# Altium PCB 2016.PcbDoc (part 3 of 6)
Units mm, origin at the board's own origin, x right, y up, seen from the top; angles counter-clockwise.
Board outline 169.8 x 134.24 mm, 2 copper layers (Top Layer, Bottom Layer); 131 components, 191 nets, 797 pads, 168 vias.
Unrouted connection lines stored in the file: 2.
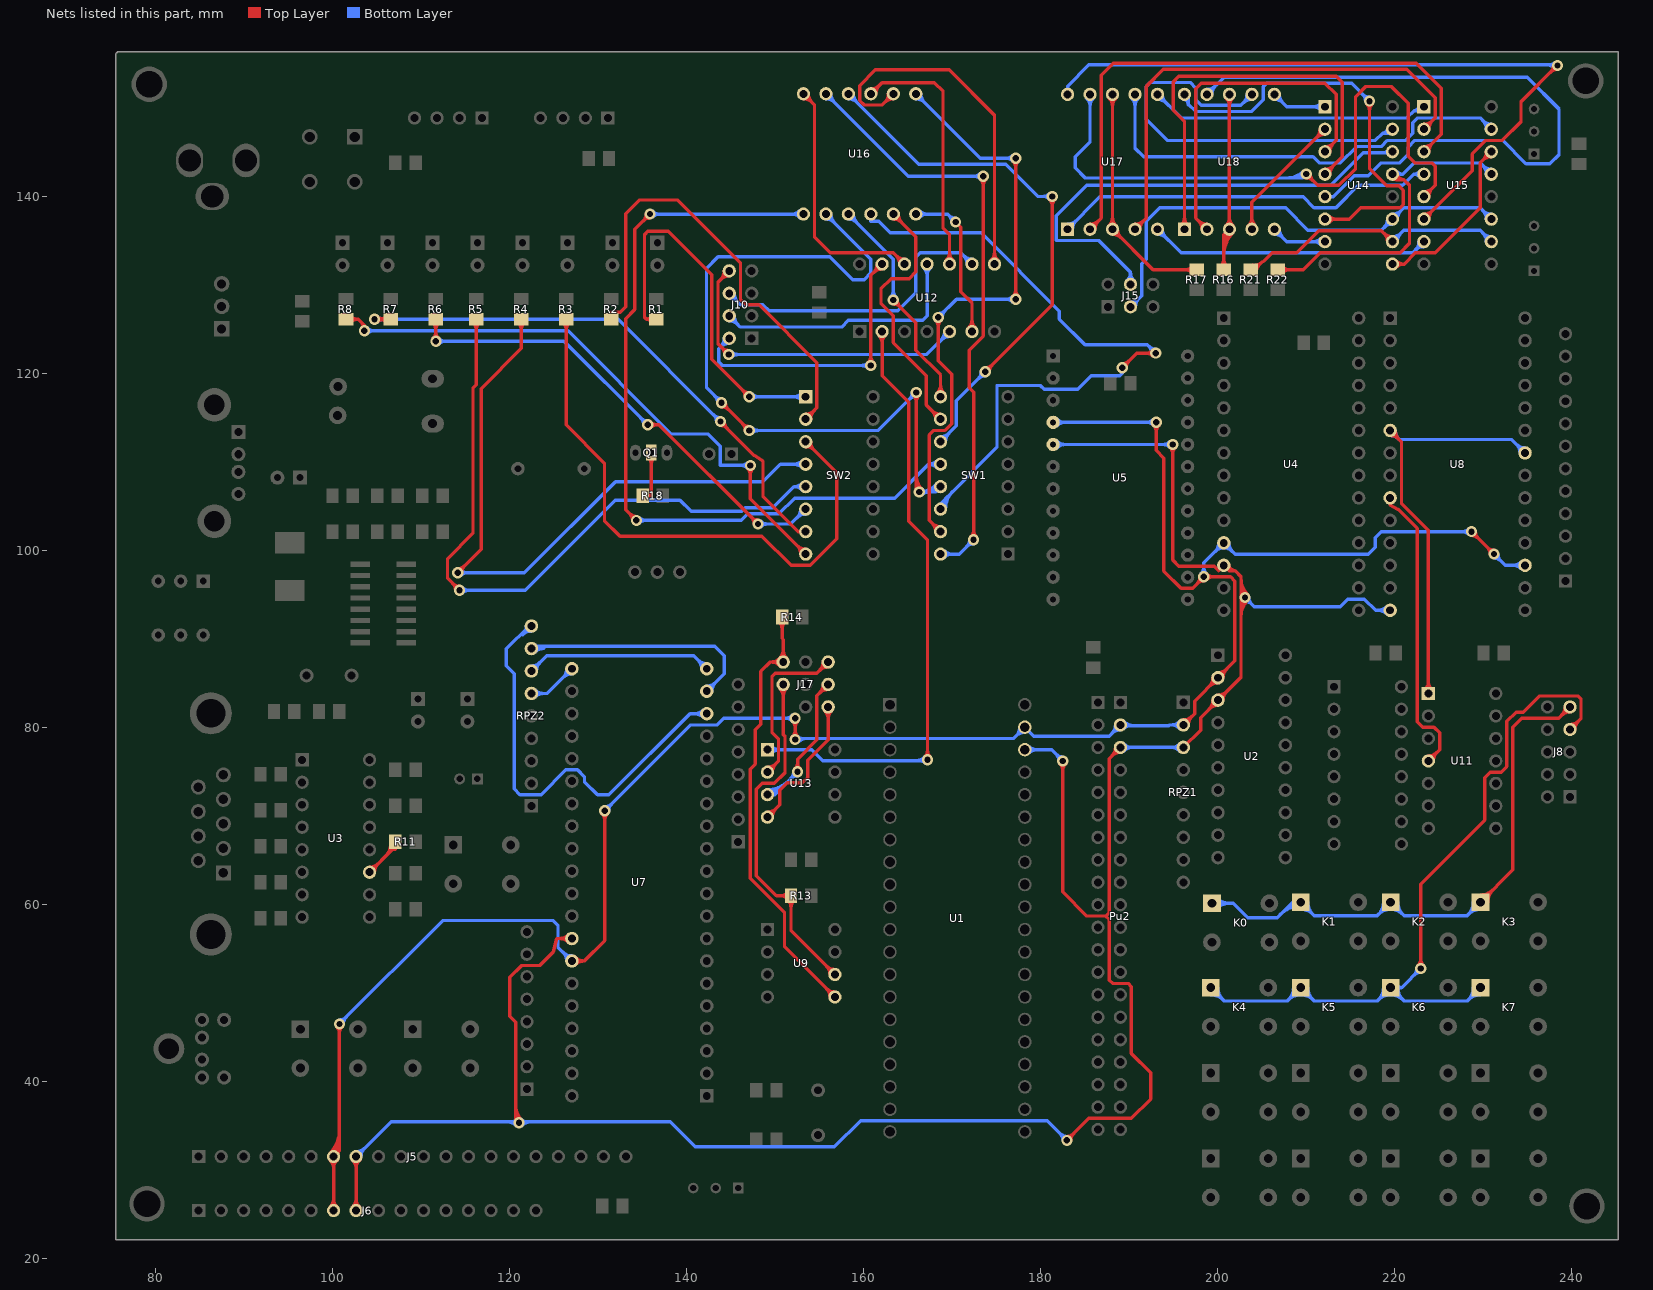
[diagram p3: the nets of this part, all layers, seen from the top]

## Via types
v1: diameter 1.27, hole 0.711, Top Layer to Bottom Layer, 165 vias
v2: diameter 1, hole 0.5, Top Layer to Bottom Layer, 3 vias

## Nets (pads, with @x,y where several pads share a name; then routed paths per layer and width w, separated by ;. In a path a pad name is that pad's centre, name@x,y a point inside that pad or via, vN(x,y) a via of type N, cw(c..) or ccw(c..) an arc to the next point about the centre after c; other vN are vias at no path point) (continued)
NetJ8_7: J8.7 K4.1 K5.1 K6.1 K7.1 | length 119.8
  Top Layer w0.381: v1@222.596,53.07 ccw(c221.837,53.829) 222.91,53.829 ccw(c223.984,53.829) v1@223.225,53.07 ; v1(222.91,52.756) 222.91,62.282 230.149,69.52 230.149,74.295 230.784,74.93 232.004,74.93 232.639,75.565 232.639,80.671 233.68,81.712 234.518,81.712 236.348,83.541 240.665,83.541 241.021,83.185 241.021,81.001 J8.7@239.776,79.756 ; J8.7@239.776,80.315 ccw(c239.776,81.666) 240.731,80.711 ccw(c241.686,79.756) J8.7@240.335,79.756
  Bottom Layer w0.381: K4.1@199.188,49.777 cw(c199.188,47.823) 200.57,49.205 cw(c201.952,50.587) K4.1@199.998,50.587 ; K4.1@199.188,50.158 cw(c199.188,49.124) 199.92,49.856 cw(c200.651,50.587) K4.1@199.617,50.587 ; K4.1@199.188,50.587 200.702,49.073 207.834,49.073 K5.1@209.348,50.587 210.862,49.073 217.994,49.073 K6.1@219.508,50.587 ; K5.1@208.539,50.587 cw(c206.584,50.587) 207.966,49.205 cw(c209.348,47.823) 209.348,49.777 cw(c209.348,47.823) 210.73,49.205 cw(c212.112,50.587) K5.1@210.158,50.587 ; K5.1@208.92,50.587 cw(c207.885,50.587) 208.617,49.856 cw(c209.348,49.124) 209.348,50.158 cw(c209.348,49.124) 210.08,49.856 cw(c210.811,50.587) K5.1@209.777,50.587 ; K6.1@218.699,50.587 cw(c216.744,50.587) 218.126,49.205 cw(c219.508,47.823) 219.508,49.777 cw(c219.508,47.823) 220.89,49.205 cw(c222.272,50.587) K6.1@220.318,50.587 ; K6.1@219.08,50.587 cw(c218.045,50.587) 218.777,49.856 cw(c219.508,49.124) 219.508,50.158 cw(c219.508,49.124) 220.24,49.856 cw(c220.971,50.587) K6.1@219.937,50.587 ; K6.1@220.251,50.265 cw(c220.742,50.052) 220.742,50.587 ; K6.1@220.251,50.909 ccw(c220.742,51.122) 220.742,50.587 ; v1@222.466,52.756 cw(c221.393,52.756) 222.152,51.997 cw(c222.91,51.238) v1@222.91,52.311 ; v1(222.91,52.756) 220.742,50.587 ; K7.1@228.859,50.587 cw(c226.904,50.587) 228.286,49.205 cw(c229.668,47.823) K7.1@229.668,49.777 ; K7.1@229.24,50.587 cw(c228.205,50.587) 228.937,49.856 cw(c229.668,49.124) K7.1@229.668,50.158 ; K7.1@229.668,50.587 228.154,49.073 221.022,49.073 K6.1@219.508,50.587 ; K6.1@219.508,50.587 220.742,50.587
NetJ8_9: J8.9 K0.1 K1.1 K2.1 K3.1 | length 97.6
  Top Layer w0.381: K3.1@229.668,60.239 233.325,63.896 233.325,80.023 234.315,81.013 238.493,81.013 J8.9@239.776,82.296 ; K3.1@229.668,60.667 ccw(c229.668,61.702) 230.4,60.97 ccw(c231.131,60.239) K3.1@230.097,60.239 ; K3.1@229.668,61.048 ccw(c229.668,63.003) 231.05,61.621 ccw(c232.432,60.239) K3.1@230.478,60.239 ; J8.9@239.217,82.296 cw(c237.866,82.296) 238.821,81.341 cw(c239.776,80.386) J8.9@239.776,81.737
  Bottom Layer w0.381: K0.1@199.315,60.112 201.737,60.112 203.352,58.496 206.69,58.496 208.432,60.239 K1.1@209.348,60.239 210.862,58.725 217.994,58.725 K2.1@219.508,60.239 221.022,58.725 228.154,58.725 K3.1@229.668,60.239 ; K0.1@199.618,59.809 cw(c200.35,59.078) 200.35,60.112 cw(c200.35,61.146) K0.1@199.618,60.415 ; K0.1@199.887,59.54 cw(c201.269,58.158) 201.269,60.112 cw(c201.269,62.066) K0.1@199.887,60.684 ; 207.053,58.86 cw(c209.348,56.566) 209.348,59.81 cw(c209.348,58.776) 210.08,59.508 cw(c210.811,60.239) K1.1@209.777,60.239 ; 207.704,59.51 cw(c209.348,57.866) K1.1@209.348,60.191 ; K1.1@209.348,59.429 cw(c209.348,57.475) 210.73,58.857 cw(c212.112,60.239) K1.1@210.158,60.239 ; K2.1@218.699,60.239 cw(c216.744,60.239) 218.126,58.857 cw(c219.508,57.475) 219.508,59.429 cw(c219.508,57.475) 220.89,58.857 cw(c222.272,60.239) K2.1@220.318,60.239 ; K2.1@219.08,60.239 cw(c218.045,60.239) 218.777,59.508 cw(c219.508,58.776) 219.508,59.81 cw(c219.508,58.776) 220.24,59.508 cw(c220.971,60.239) K2.1@219.937,60.239 ; K3.1@228.859,60.239 cw(c226.904,60.239) 228.286,58.857 cw(c229.668,57.475) K3.1@229.668,59.429 ; K3.1@229.24,60.239 cw(c228.205,60.239) 228.937,59.508 cw(c229.668,58.776) K3.1@229.668,59.81
NetJ10_2: J10.2 U12.13 | length 40.1
  Top Layer w0.381: v1@160.468,121.193 ccw(c159.709,121.952) 160.782,121.952 ccw(c161.855,121.952) v1@161.096,121.193 ; v1(160.782,120.879) 160.782,131.064 U12.13@162.052,132.334 ; U12.13@161.493,132.334 cw(c160.142,132.334) 161.097,131.379 cw(c162.052,130.424) U12.13@162.052,131.775
  Bottom Layer w0.381: J10.2@144.221,123.952 cw(c142.87,123.952) 143.825,122.997 cw(c144.78,122.042) J10.2@144.78,123.393 ; J10.2@144.78,123.952 143.586,122.758 143.586,121.285 143.993,120.879 v1(160.782,120.879) ; v1@160.468,120.564 ccw(c159.709,119.805) 159.709,120.879 ccw(c159.709,121.952) v1@160.468,121.193
NetJ10_4: J10.4 U12.11 | length 33.5
  Bottom Layer w0.381: J10.4@144.78,125.933 cw(c144.78,124.582) 145.735,125.537 cw(c146.69,126.492) J10.4@145.339,126.492 ; J10.4@144.78,126.492 146.05,125.222 157.48,125.222 158.242,125.984 166.639,125.984 167.132,126.477 U12.11@167.132,132.334 ; U12.11@166.736,131.938 cw(c165.781,130.983) 167.132,130.983 cw(c168.483,130.983) U12.11@167.528,131.938
NetJ10_6: J10.6 U12.9 | length 38.1
  Bottom Layer w0.381: J10.6@144.78,128.473 cw(c144.78,127.122) 145.735,128.077 cw(c146.69,129.032) J10.6@145.339,129.032 ; J10.6@144.78,129.032 146.05,127.762 148.565,127.762 149.276,127.051 163.83,127.051 165.862,129.083 165.862,133.096 166.37,133.604 170.942,133.604 U12.9@172.212,132.334 ; U12.9@171.653,132.334 ccw(c170.302,132.334) 171.257,133.289 ccw(c172.212,134.244) U12.9@172.212,132.893
NetJ10_8: J10.8 U12.5 | length 44.1
  Top Layer w0.381: J10.8@144.221,131.572 cw(c142.87,131.572) 143.825,130.617 cw(c144.78,129.662) J10.8@144.78,131.013 ; v1@144.285,122.123 ccw(c143.212,122.123) 143.97,122.882 ccw(c144.729,123.641) v1@144.729,122.568 ; v1(144.729,122.123) 143.51,123.342 143.51,130.302 J10.8@144.78,131.572
  Bottom Layer w0.381: v1(144.729,122.123) 167.081,122.123 U12.5@169.672,124.714 ; v1@145.044,121.809 cw(c145.802,121.05) 145.802,122.123 cw(c145.802,123.196) v1@145.044,122.438 ; U12.5@169.113,124.714 cw(c167.762,124.714) 168.717,123.759 cw(c169.672,122.804) U12.5@169.672,124.155
NetJ15_3: J15.3 U14.11 U15.11 | length 61.1
  Bottom Layer w0.381: J15.3@190.119,127.508 191.389,128.778 191.389,132.374 191.897,132.882 191.897,137.16 193.421,138.684 207.644,138.684 210.159,136.169 218.465,136.169 U14.11@219.71,137.414 220.98,138.684 229.616,138.684 U15.11@230.886,137.414 ; J15.3@190.119,128.067 ccw(c190.119,129.418) 191.074,128.463 ccw(c192.029,127.508) J15.3@190.678,127.508 ; U14.11@219.151,137.414 cw(c217.8,137.414) 218.755,136.459 cw(c219.71,135.504) U14.11@219.71,136.855 ; U14.11@219.71,137.973 ccw(c219.71,139.324) 220.665,138.369 ccw(c221.62,137.414) U14.11@220.269,137.414 ; U15.11@230.327,137.414 ccw(c228.976,137.414) 229.931,138.369 ccw(c230.886,139.324) U15.11@230.886,137.973
NetJ15_4: J15.4 U14.14 | length 57.2
  Bottom Layer w0.381: J15.4@189.723,130.444 ccw(c188.768,131.399) 190.119,131.399 ccw(c191.47,131.399) J15.4@190.515,130.444 ; J15.4@190.119,130.048 190.119,131.419 186.537,135.001 181.737,135.001 181.737,137.795 185.191,141.249 212.724,141.249 216.408,144.932 219.013,144.932 219.013,145.034 U14.14@219.71,145.034
NetJ17_1: J17.1 R14.1 U9.5 | length 57.7
  Top Layer w0.381: R14.1@150.39,91.97 cw(c149.523,91.103) 150.749,91.103 cw(c151.975,91.103) R14.1@151.108,91.97 ; J17.1@150.472,86.972 ccw(c149.496,85.996) 149.496,87.376 ccw(c149.496,88.756) 150.472,87.78 ccw(c149.496,88.756) 150.876,88.756 ccw(c152.256,88.756) J17.1@151.28,87.78 ; R14.1@150.749,92.456 150.749,90.043 150.876,89.916 J17.1@150.876,87.376 149.406,87.376 148.336,86.306 148.336,80.346 147.727,79.738 147.727,75.845 147.167,75.285 147.167,62.917 151.029,59.055 151.029,55.219 U9.5@156.718,49.53 ; U9.5@156.159,49.53 ccw(c154.808,49.53) 155.763,50.485 ccw(c156.718,51.44) U9.5@156.718,50.089
NetJ17_2: J17.2 R13.1 U9.6 | length 47.8
  Top Layer w0.381: J17.2@150.472,84.432 cw(c149.496,83.456) 150.876,83.456 cw(c152.256,83.456) J17.2@151.28,84.432 ; J17.2@150.876,84.836 150.876,79.172 151.079,78.969 151.079,74.854 149.885,73.66 148.514,73.66 147.853,72.999 147.853,63.221 150.114,60.96 R13.1@151.765,60.96 151.765,57.023 U9.6@156.718,52.07 ; R13.1@151.406,60.474 cw(c150.539,59.607) 151.765,59.607 cw(c152.991,59.607) R13.1@152.124,60.474 ; R13.1@151.406,60.601 ccw(c150.539,59.734) 150.539,60.96 ccw(c150.539,62.186) R13.1@151.406,61.319 ; U9.6@156.159,52.07 ccw(c154.808,52.07) 155.763,53.025 ccw(c156.718,53.98) U9.6@156.718,52.629
NetJ17_6: J17.6 U13.2 | length 22.9
  Top Layer w0.381: U13.2@149.098,74.93 150.343,76.175 150.343,78.715 149.606,79.452 149.606,85.725 149.987,86.106 154.686,86.106 J17.6@155.956,87.376 ; U13.2@149.098,75.489 ccw(c149.098,76.84) 150.053,75.885 ccw(c151.008,74.93) U13.2@149.657,74.93 ; J17.6@155.385,87.376 cw(c154.005,87.376) 154.98,86.4 cw(c155.956,85.425) J17.6@155.956,86.804
NetJ17_7: J17.7 U13.3 | length 26.9
  Top Layer w0.381: v1@152.187,75.295 ccw(c151.428,76.054) 152.502,76.054 ccw(c153.575,76.054) v1@152.816,75.295 ; v1(152.502,74.981) 152.502,76.403 154.686,78.588 154.686,83.566 J17.7@155.956,84.836 ; J17.7@155.385,84.836 cw(c154.005,84.836) 154.98,83.86 cw(c155.956,82.885) J17.7@155.956,84.264
  Bottom Layer w0.381: U13.3@149.098,72.187 ccw(c149.098,73.661) 150.14,72.619 ; U13.3@149.098,72.39 149.911,72.39 v1(152.502,74.981) ; U13.3@149.098,72.568 ccw(c149.098,74.962) 150.79,73.269 ; U13.3@149.098,72.949 ccw(c149.098,76.263) 151.441,73.92 ; v1@152.057,74.981 cw(c150.984,74.981) 151.743,74.222 cw(c152.502,73.463) v1@152.502,74.536
NetJ17_8: J17.8 U13.4 | length 20.6
  Top Layer w0.381: U13.4@149.098,69.85 150.47,71.222 150.47,72.873 151.312,73.715 153.052,73.715 153.632,74.295 153.632,76.263 155.956,78.588 J17.8@155.956,82.296 ; U13.4@149.098,70.409 ccw(c149.098,71.76) 150.053,70.805 ccw(c151.008,69.85) U13.4@149.657,69.85 ; J17.8@155.552,81.892 cw(c154.576,80.916) 155.956,80.916 cw(c157.336,80.916) J17.8@156.36,81.892
NetQ1_1: Q1.1 R18.1 | length 8.7
  Top Layer w0.381: R18.1@135.001,106.172 135.966,106.172 ; R18.1@135.42,105.884 cw(c135.966,105.509) 135.966,106.172 ; R18.1@135.42,106.46 ccw(c135.966,106.835) 135.966,106.172 ; Q1.1@135.677,110.434 cw(c134.978,109.735) 135.966,109.735 cw(c136.955,109.735) Q1.1@136.256,110.434 ; Q1.1@135.966,111.023 135.966,106.172
NetR1_1: R1.1 SW2.1 | length 49.2
  Top Layer w0.381: R1.1@135.979,125.823 ccw(c135.433,125.448) 135.433,126.111 ; R1.1@135.979,126.399 cw(c135.433,126.774) 135.433,126.111 ; R1.1@136.525,126.111 135.433,126.111 ; v1@146.596,117.348 ccw(c145.523,117.348) 146.282,118.107 ccw(c147.041,118.866) v1@147.041,117.792 ; v1(147.041,117.348) 142.824,121.564 142.824,131.115 137.897,136.042 135.572,136.042 135.204,135.674 135.204,126.34 135.433,126.111
  Bottom Layer w0.381: v1(147.041,117.348) SW2.1@153.416,117.348 ; v1@147.355,117.034 cw(c148.114,116.275) 148.114,117.348 cw(c148.114,118.421) v1@147.355,117.662 ; SW2.1@153.02,116.952 ccw(c152.065,115.997) 152.065,117.348 ccw(c152.065,118.699) SW2.1@153.02,117.744
NetR2_1: R2.1 SW2.2 | length 55.3
  Top Layer w0.381: R2.1@131.243,126.577 ccw(c131.108,126.886) 131.445,126.886 ; R2.1@131.445,126.111 131.445,126.886 ; R2.1@131.647,126.577 cw(c131.782,126.886) 131.445,126.886 ; SW2.2@153.416,114.808 154.686,116.078 154.686,121.197 148.145,127.737 146.685,127.737 146.05,128.372 146.05,132.486 138.963,139.573 134.62,139.573 133.096,138.049 133.096,127.533 132.448,126.886 131.445,126.886 ; SW2.2@153.416,115.367 ccw(c153.416,116.718) 154.371,115.763 ccw(c155.326,114.808) SW2.2@153.975,114.808
NetR3_1: R3.1 SW2.3 | length 70.6
  Top Layer w0.381: R3.1@126.006,125.752 cw(c125.139,124.885) 126.365,124.885 cw(c127.591,124.885) R3.1@126.724,125.752 ; R3.1@126.365,126.111 126.365,114.173 130.683,109.855 130.683,103.353 132.437,101.599 148.464,101.599 151.765,98.298 153.924,98.298 156.934,101.308 156.934,108.75 SW2.3@153.416,112.268 ; SW2.3@153.416,111.709 cw(c153.416,110.358) 154.371,111.313 cw(c155.326,112.268) SW2.3@153.975,112.268
NetR4_1: R4.1 SW2.4 | length 83.4
  Top Layer w0.381: v1(114.097,97.46) 116.751,100.114 116.751,118.275 121.285,122.809 R4.1@121.285,126.111 ; v1@114.097,97.904 ccw(c114.097,98.977) 114.856,98.219 ccw(c115.614,97.46) v1@114.541,97.46 ; R4.1@120.926,125.752 cw(c120.059,124.885) 121.285,124.885 cw(c122.511,124.885) R4.1@121.644,125.752
  Bottom Layer w0.381: v1(114.097,97.46) 121.64,97.46 131.928,107.748 148.59,107.748 150.57,109.728 SW2.4@153.416,109.728 ; v1@114.411,97.145 cw(c115.17,96.387) 115.17,97.46 cw(c115.17,98.533) v1@114.411,97.774 ; SW2.4@153.02,109.332 ccw(c152.065,108.377) 152.065,109.728 ccw(c152.065,111.079) SW2.4@153.02,110.124
NetR5_1: R5.1 SW2.5 | length 84.9
  Top Layer w0.381: v1@113.855,95.479 ccw(c112.782,95.479) 113.541,96.237 ccw(c114.3,96.996) v1@114.3,95.923 ; v1(114.3,95.479) 112.954,96.825 112.954,99.06 115.824,101.93 115.824,118.313 116.205,118.694 R5.1@116.205,126.111 ; R5.1@115.846,125.752 cw(c114.979,124.885) 116.205,124.885 cw(c117.431,124.885) R5.1@116.564,125.752
  Bottom Layer w0.381: v1(114.3,95.479) 121.717,95.479 131.902,105.664 139.217,105.664 140.462,104.419 146.193,104.419 146.573,104.799 149.707,104.799 152.095,107.188 ; v1@114.614,95.164 cw(c115.373,94.405) 115.373,95.479 cw(c115.373,96.552) v1@114.614,95.793 ; SW2.5@153.014,106.799 ccw(c152.095,105.909) 152.095,107.188 ; SW2.5@153.014,107.577 cw(c152.095,108.467) 152.095,107.188 ; SW2.5@153.416,107.188 152.095,107.188
NetR6_1: R6.1 SW2.6 | length 67.7
  Top Layer w0.381: R6.1@111.274,125.752 cw(c110.407,124.885) 111.633,124.885 cw(c112.859,124.885) R6.1@111.992,125.752 ; v1@111.319,123.936 ccw(c110.56,124.695) 111.633,124.695 ccw(c112.706,124.695) v1@111.947,123.936 ; v1(111.633,123.622) R6.1@111.633,126.111 ; v1(135.56,114.173) 136.83,114.173 v1(148.031,102.972) ; v1@135.874,113.859 cw(c136.633,113.1) 136.633,114.173 cw(c136.633,115.246) v1@135.874,114.487 ; v1@147.587,102.972 ccw(c146.514,102.972) 147.272,103.73 ccw(c148.031,104.489) v1@148.031,103.416
  Bottom Layer w0.381: v1(111.633,123.622) 126.111,123.622 v1(135.56,114.173) ; v1@111.947,123.307 cw(c112.706,122.549) 112.706,123.622 cw(c112.706,124.695) v1@111.947,123.936 ; v1@135.115,114.173 ccw(c134.042,114.173) 134.801,114.932 ccw(c135.56,115.691) v1@135.56,114.617 ; v1(148.031,102.972) 151.74,102.972 SW2.6@153.416,104.648 ; v1@148.346,102.657 cw(c149.104,101.898) 149.104,102.972 cw(c149.104,104.045) v1@148.346,103.286 ; SW2.6@152.857,104.648 cw(c151.506,104.648) 152.461,103.693 cw(c153.416,102.738) SW2.6@153.416,104.089
NetR7_1: R7.1 SW2.7 | length 71.4
  Top Layer w0.381: v1(104.699,126.111) R7.1@106.553,126.111 ; v1@105.013,125.797 cw(c105.772,125.038) 105.772,126.111 cw(c105.772,127.184) v1@105.013,126.425 ; R7.1@106.067,125.752 ccw(c105.2,124.885) 105.2,126.111 ccw(c105.2,127.337) R7.1@106.067,126.47 ; v1@143.789,114.097 cw(c143.789,113.024) 144.548,113.782 cw(c145.307,114.541) v1@144.234,114.541 ; v1(143.789,114.541) 147.625,110.706 148.591,110.07 148.591,106.095 152.578,102.108 SW2.7@153.416,102.108
  Bottom Layer w0.381: v1(104.699,126.111) 132.22,126.111 v1(143.789,114.541) ; v1@105.013,125.797 cw(c105.772,125.038) 105.772,126.111 cw(c105.772,127.184) v1@105.013,126.425 ; v1@143.345,114.541 ccw(c142.272,114.541) 143.031,115.3 ccw(c143.789,116.059) v1@143.789,114.986
NetR8_1: R8.1 SW2.8 | length 77
  Top Layer w0.381: R8.1@101.473,126.111 102.87,126.111 103.556,125.425 v1(103.556,124.816) ; R8.1@101.959,125.752 cw(c102.826,124.885) 102.826,126.111 cw(c102.826,127.337) R8.1@101.959,126.47 ; 103.129,125.852 cw(c102.234,124.957) v1@103.493,124.822 ; v1@146.853,109.261 cw(c146.094,108.502) 147.168,108.502 cw(c148.241,108.502) v1@147.482,109.261 ; v1(147.168,109.576) 147.168,105.816 SW2.8@153.416,99.568 ; SW2.8@152.857,99.568 ccw(c151.506,99.568) 152.461,100.523 ccw(c153.416,101.478) SW2.8@153.416,100.127
  Bottom Layer w0.381: v1(103.556,124.816) 126.568,124.816 138.252,113.132 142.392,113.132 143.764,111.76 143.764,109.601 147.142,109.601 v1(147.168,109.576) ; v1@103.87,124.501 cw(c104.629,123.742) 104.629,124.816 cw(c104.629,125.889) v1@103.87,125.13 ; 146.033,109.601 cw(c146.033,108.441) v1@146.853,109.261 ; 146.156,109.601 ccw(c146.156,110.587) v1@146.853,109.89
NetR11_2: R11.2 U3.11 | length 11
  Top Layer w0.381: U3.11@104.14,63.627 106.705,66.192 107.061,66.192 ; U3.11@104.14,64.186 ccw(c104.14,65.537) 105.095,64.582 ccw(c106.05,63.627) U3.11@104.699,63.627 ; 105.924,65.411 ccw(c104.407,66.929) R11.2@106.553,66.929 ; 106.575,66.062 ccw(c105.708,66.929) R11.2@106.934,66.929 ; R11.2@107.061,67.056 107.061,66.192 ; 107.061,66.192 cw(c107.341,66.192) 107.242,66.454 ccw(c107.341,66.192) 107.061,66.192 ; 107.061,66.192 ccw(c106.781,66.192) 106.88,66.454 cw(c106.781,66.192) 107.061,66.192
NetR16_2: R16.2 U18.3 U18.8 | length 32.4
  Top Layer w0.381: R16.2@200.301,132.058 ccw(c199.434,132.925) 200.66,132.925 ccw(c201.886,132.925) R16.2@201.019,132.058 ; R16.2@200.66,131.699 200.66,135.636 U18.3@201.295,136.271 U18.8@201.295,151.511 ; 200.66,133.387 cw(c204.179,133.387) U18.3@201.691,135.875 ; 200.66,134.307 cw(c203.259,134.307) U18.3@201.421,136.145 ; 200.66,135.227 cw(c202.339,135.227) U18.3@201.152,136.414 ; U18.3@200.899,136.667 ccw(c199.944,137.622) 201.295,137.622 ccw(c202.646,137.622) U18.3@201.691,136.667 ; U18.8@200.899,151.115 cw(c199.944,150.16) 201.295,150.16 cw(c202.646,150.16) U18.8@201.691,151.115
NetR17_1: R17.1 U17.3 U17.8 | length 35
  Top Layer w0.381: U17.3@187.691,136.667 ccw(c186.736,137.622) 188.087,137.622 ccw(c189.438,137.622) U17.3@188.483,136.667 ; U17.8@187.691,151.115 cw(c186.736,150.16) 188.087,150.16 cw(c189.438,150.16) U17.8@188.483,151.115 ; U17.3@188.087,135.712 cw(c188.087,134.361) 189.042,135.316 cw(c189.997,136.271) U17.3@188.646,136.271 ; U17.8@188.087,151.511 U17.3@188.087,136.271 192.659,131.699 R17.1@197.612,131.699 ; R17.1@197.126,131.34 ccw(c196.259,130.473) 196.259,131.699 ccw(c196.259,132.925) R17.1@197.126,132.058
NetR21_2: R21.2 U14.10 U15.10 | length 38.8
  Top Layer w0.381: R21.2@203.708,131.699 205.232,132.715 206.121,133.604 208.876,133.604 211.391,136.119 218.465,136.119 U14.10@219.71,134.874 ; R21.2@203.935,132.197 ccw(c204.128,133.164) 204.675,132.344 ; R21.2@204.333,131.599 cw(c205.772,131.312) 204.958,132.532 ; U14.10@219.151,134.874 ccw(c217.8,134.874) 218.755,135.829 ccw(c219.71,136.784) U14.10@219.71,135.433
  Bottom Layer w0.381: U14.10@219.71,134.874 220.98,136.144 229.616,136.144 U15.10@230.886,134.874 ; U14.10@219.71,135.433 ccw(c219.71,136.784) 220.665,135.829 ccw(c221.62,134.874) U14.10@220.269,134.874 ; U15.10@230.327,134.874 ccw(c228.976,134.874) 229.931,135.829 ccw(c230.886,136.784) U15.10@230.886,135.433
NetR22_2: R22.2 U14.13 U15.13 | length 46.2
  Top Layer w0.381: R22.2@206.756,131.699 209.626,131.699 211.556,133.629 220.599,133.629 221.641,134.671 221.641,141.224 220.98,141.885 ; R22.2@207.242,131.34 cw(c208.109,130.473) 208.109,131.699 cw(c208.109,132.925) R22.2@207.242,132.058 ; U14.13@219.508,142.477 ccw(c220.152,142.531) 220.152,141.885 ; U14.13@219.71,142.494 220.319,141.885 220.98,141.885 ; U14.13@219.888,142.509 ccw(c220.566,142.565) 220.566,141.885 ; U14.13@220.268,142.541 ccw(c220.98,142.6) 220.98,141.885
  Bottom Layer w0.381: U14.13@219.71,142.494 220.904,142.494 ; U14.13@220.14,142.136 cw(c220.904,141.5) 220.904,142.494 ; U14.13@220.14,142.852 ccw(c220.904,143.488) 220.904,142.494 ; U15.13@230.327,142.494 ccw(c228.976,142.494) 229.931,143.449 ccw(c230.886,144.404) U15.13@230.886,143.053 ; U15.13@230.886,142.494 229.616,143.764 222.174,143.764 220.904,142.494
NetRPZ2_6: RPZ2.6 U7.21 | length 10.1
  Bottom Layer w0.381: RPZ2.6@122.428,83.82 124.206,83.82 U7.21@127,86.614 ; RPZ2.6@122.832,83.416 cw(c123.808,82.44) 123.808,83.82 cw(c123.808,85.2) RPZ2.6@122.832,84.224 ; U7.21@126.428,86.614 cw(c125.049,86.614) 126.024,85.638 cw(c127,84.663) U7.21@127,86.042
NetRPZ2_7: RPZ2.7 U7.20 | length 25.5
  Bottom Layer w0.381: RPZ2.7@122.428,86.36 124.155,88.087 140.767,88.087 U7.20@142.24,86.614 ; RPZ2.7@122.428,86.931 ccw(c122.428,88.311) 123.404,87.336 ccw(c124.379,86.36) RPZ2.7@122.999,86.36 ; U7.20@141.668,86.614 ccw(c140.289,86.614) 141.264,87.59 ccw(c142.24,88.565) U7.20@142.24,87.185
NetRPZ2_8: RPZ2.8 U7.19 | length 31.5
  Bottom Layer w0.381: RPZ2.8@122.428,88.9 122.682,89.154 143.129,89.154 144.196,88.087 144.196,86.03 U7.19@142.24,84.074 ; RPZ2.8@122.832,88.496 cw(c123.808,87.52) 123.808,88.9 cw(c123.808,90.28) RPZ2.8@122.832,89.304 ; U7.19@142.24,84.645 ccw(c142.24,86.025) 143.216,85.05 ccw(c144.191,84.074) U7.19@142.811,84.074
NetRPZ2_9: RPZ2.9 U7.18 | length 52.9
  Bottom Layer w0.381: RPZ2.9@121.856,91.44 cw(c120.477,91.44) 121.452,90.464 cw(c122.428,89.489) RPZ2.9@122.428,90.868 ; RPZ2.9@122.428,91.44 122.174,91.44 119.596,88.862 119.596,86.931 120.472,86.055 120.472,73.05 121.133,72.39 123.52,72.39 126.314,75.184 127.635,75.184 128.422,74.397 128.422,73.838 129.896,72.365 131.178,72.365 140.348,81.534 U7.18@142.24,81.534 ; U7.18@141.836,81.13 ccw(c140.86,80.154) 140.86,81.534 ccw(c140.86,82.914) U7.18@141.836,81.938
NetSW1_9: SW1.9 U16.3 | length 32.6
  Top Layer w0.381: v1@163.322,127.825 cw(c163.322,126.752) 164.081,127.511 cw(c164.84,128.27) v1@163.766,128.27 ; v1(163.322,128.27) 165.862,125.73 165.862,122.603 168.656,119.809 SW1.9@168.656,117.348 ; SW1.9@168.26,117.744 ccw(c167.305,118.699) 168.656,118.699 ccw(c170.007,118.699) SW1.9@169.052,117.744
  Bottom Layer w0.381: U16.3@158.242,137.426 cw(c158.242,136.075) 159.197,137.03 cw(c160.152,137.986) U16.3@158.801,137.986 ; U16.3@158.242,137.986 163.322,132.905 v1(163.322,128.27) ; v1@163.008,128.584 ccw(c162.249,129.343) 163.322,129.343 ccw(c164.395,129.343) v1@163.636,128.584
NetSW1_10: SW1.10 U16.5 | length 34.1
  Top Layer w0.381: U16.5@163.322,137.426 cw(c163.322,136.075) 164.277,137.03 cw(c165.232,137.986) U16.5@163.881,137.986 ; U16.5@163.322,137.986 165.862,135.445 165.862,131.445 165.1,130.683 163.068,130.683 161.925,129.54 161.925,127.902 163.322,126.505 163.322,123.469 167.049,119.742 167.049,116.415 SW1.10@168.656,114.808 ; SW1.10@168.097,114.808 ccw(c166.746,114.808) 167.701,115.763 ccw(c168.656,116.718) SW1.10@168.656,115.367
NetSW1_11: SW1.11 U16.10 | length 71.8
  Top Layer w0.381: v1(173.711,120.167) 181.28,127.737 v1(181.28,139.979) ; v1@173.711,120.612 ccw(c173.711,121.685) 174.469,120.926 ccw(c175.228,120.167) v1@174.155,120.167 ; v1@180.965,139.665 cw(c180.207,138.906) 181.28,138.906 cw(c182.353,138.906) v1@181.594,139.665
  Bottom Layer w0.381: U16.10@158.242,151.015 cw(c158.242,149.664) 159.197,150.619 cw(c160.152,151.575) U16.10@158.801,151.575 ; U16.10@158.242,151.575 166.205,143.612 176.002,143.612 179.634,139.979 v1(181.28,139.979) ; SW1.11@168.656,112.268 170.434,114.046 170.434,116.891 v1(173.711,120.167) ; SW1.11@168.656,112.827 ccw(c168.656,114.178) 169.611,113.223 ccw(c170.566,112.268) SW1.11@169.215,112.268 ; v1@173.266,120.167 cw(c172.193,120.167) 172.952,119.409 cw(c173.711,118.65) v1@173.711,119.723 ; v1@180.965,139.665 ccw(c180.207,138.906) 180.207,139.979 ccw(c180.207,141.053) v1@180.965,140.294
NetSW1_12: SW1.12 U16.1 | length 101.6
  Top Layer w0.381: v1@133.845,103.378 ccw(c132.772,103.378) 133.531,104.137 ccw(c134.29,104.896) v1@134.29,103.822 ; v1(134.29,103.378) 133.071,104.597 133.071,126.162 134.112,127.203 134.112,136.271 v1(135.826,137.986) ; v1@135.382,137.986 cw(c134.309,137.986) 135.068,137.227 cw(c135.826,136.468) v1@135.826,137.541
  Bottom Layer w0.381: v1(134.29,103.378) 146.143,103.378 146.878,104.114 150.391,104.114 152.171,105.893 163.461,105.893 167.295,109.728 SW1.12@168.656,109.728 ; v1@134.604,103.064 cw(c135.363,102.305) 135.363,103.378 cw(c135.363,104.451) v1@134.604,103.692 ; v1(135.826,137.986) U16.1@153.162,137.986 ; v1@136.141,137.671 cw(c136.9,136.912) 136.9,137.986 cw(c136.9,139.059) v1@136.141,138.3 ; U16.1@152.767,137.59 ccw(c151.813,136.636) 151.813,137.986 ccw(c151.813,139.335) U16.1@152.767,138.381 ; SW1.12@168.26,109.332 ccw(c167.305,108.377) 167.305,109.728 ccw(c167.305,111.079) SW1.12@168.26,110.124
NetSW1_13: SW1.13 U16.2 | length 106.1
  Top Layer w0.381: v1@143.916,116.218 cw(c143.916,115.145) 144.675,115.903 cw(c145.434,116.662) v1@144.361,116.662 ; v1(143.916,116.662) v1(147.041,113.538) ; v1@146.596,113.538 ccw(c145.523,113.538) 146.282,114.297 ccw(c147.041,115.056) v1@147.041,113.983 ; v1@165.598,117.516 cw(c164.84,116.757) 165.913,116.757 cw(c166.986,116.757) v1@166.227,117.516 ; 165.913,107.529 ccw(c167.193,107.529) v1@166.288,106.623 ; 165.913,108.449 ccw(c168.113,108.449) v1@166.557,106.893 ; v1(165.913,117.831) 165.913,106.909 v1(166.243,106.578)
  Bottom Layer w0.381: v1@143.472,116.662 ccw(c142.399,116.662) 143.158,117.421 ccw(c143.916,118.18) v1@143.916,117.107 ; v1(143.916,116.662) 142.215,118.364 142.215,131.877 143.51,133.172 156.134,133.172 158.725,130.581 160.02,130.581 160.782,131.343 160.782,132.905 U16.2@155.702,137.986 ; v1(147.041,113.538) 161.62,113.538 v1(165.913,117.831) ; v1@147.355,113.224 cw(c148.114,112.465) 148.114,113.538 cw(c148.114,114.611) v1@147.355,113.852 ; U16.2@155.702,137.426 cw(c155.702,136.075) 156.657,137.03 cw(c157.612,137.986) U16.2@156.261,137.986 ; v1@165.468,117.831 cw(c164.395,117.831) 165.154,117.072 cw(c165.913,116.313) v1@165.913,117.386 ; v1@166.557,106.264 cw(c167.316,105.505) 167.316,106.578 cw(c167.316,107.652) v1@166.557,106.893 ; 167.029,106.578 ccw(c167.029,108.472) SW1.13@168.516,107.299 ; 167.816,106.578 ccw(c167.816,107.852) SW1.13@168.815,107.062 ; SW1.13@168.217,107.535 cw(c166.243,109.093) v1(166.243,106.578) 168.046,106.578 SW1.13@168.656,107.188
NetSW1_14: SW1.14 U16.4 | length 85.3
  Top Layer w0.381: v1(189.179,120.625) 190.83,122.276 v1(192.964,122.276) ; v1@189.179,121.069 ccw(c189.179,122.142) 189.938,121.383 ccw(c190.697,120.625) v1@189.624,120.625 ; v1@192.649,121.961 ccw(c191.891,121.202) 191.891,122.276 ccw(c191.891,123.349) v1@192.649,122.59
  Bottom Layer w0.381: U16.4@160.782,137.986 160.782,137.185 161.671,137.185 162.992,135.865 173.236,135.865 182.074,127.027 182.074,126.124 184.975,123.224 192.016,123.224 v1(192.964,122.276) ; SW1.14@168.656,104.648 168.656,105.283 175.031,111.658 175.031,118.593 175.056,118.618 179.934,118.618 180.352,118.199 184.15,118.199 185.681,119.73 188.894,119.73 189.179,120.015 v1(189.179,120.625) ; SW1.14@168.834,104.648 cw(c170.798,104.648) 169.41,106.037 ; SW1.14@169.215,104.648 cw(c172.099,104.648) 170.06,106.687 ; v1@192.519,122.276 ccw(c191.446,122.276) 192.205,123.034 ccw(c192.964,123.793) v1@192.964,122.72
NetSW1_15: SW1.15 U16.7 | length 81.3
  Top Layer w0.381: v1@168.088,126 cw(c167.329,125.241) 168.402,125.241 cw(c169.475,125.241) v1@168.716,126 ; SW1.15@168.097,102.108 ccw(c166.746,102.108) 167.701,103.063 ccw(c168.656,104.018) SW1.15@168.656,102.667 ; v1(168.402,126.314) 168.402,121.412 169.926,119.888 169.926,114.3 169.164,113.538 167.894,113.538 167.386,113.03 167.386,103.378 SW1.15@168.656,102.108 ; v1@176.825,128.686 ccw(c176.066,129.445) 177.14,129.445 ccw(c178.213,129.445) v1@177.454,128.686 ; v1@176.825,143.983 cw(c176.066,143.224) 177.14,143.224 cw(c178.213,143.224) v1@177.454,143.983 ; v1(177.14,128.372) v1(177.14,144.297)
  Bottom Layer w0.381: U16.7@165.862,151.015 cw(c165.862,149.664) 166.817,150.619 cw(c167.772,151.575) U16.7@166.421,151.575 ; U16.7@165.862,151.575 173.139,144.297 v1(177.14,144.297) ; v1(168.402,126.314) 170.459,128.372 v1(177.14,128.372) ; v1@168.402,126.759 ccw(c168.402,127.832) 169.161,127.073 ccw(c169.92,126.314) v1@168.846,126.314 ; v1@176.825,128.057 ccw(c176.066,127.298) 176.066,128.372 ccw(c176.066,129.445) v1@176.825,128.686 ; v1@176.825,143.983 ccw(c176.066,143.224) 176.066,144.297 ccw(c176.066,145.371) v1@176.825,144.612
NetSW1_16: SW1.16 U16.11 | length 79
  Top Layer w0.381: v1@172.075,101.508 ccw(c171.317,102.267) 172.39,102.267 ccw(c173.463,102.267) v1@172.704,101.508 ; v1(172.39,101.194) 172.39,117.856 171.894,118.351 171.894,122.618 173.482,124.206 v1(173.482,142.265) ; v1@173.168,141.951 cw(c172.409,141.192) 173.482,141.192 cw(c174.555,141.192) v1@173.796,141.951
  Bottom Layer w0.381: U16.11@155.702,151.015 cw(c155.702,149.664) 156.657,150.619 cw(c157.612,151.575) U16.11@156.261,151.575 ; U16.11@155.702,151.575 165.011,142.265 v1(173.482,142.265) ; SW1.16@168.656,99.568 170.764,99.568 v1(172.39,101.194) ; SW1.16@169.052,99.172 cw(c170.007,98.217) 170.007,99.568 cw(c170.007,100.919) SW1.16@169.052,99.964 ; v1@171.945,101.194 cw(c170.872,101.194) 171.631,100.435 cw(c172.39,99.676) v1@172.39,100.749 ; v1@173.168,141.951 ccw(c172.409,141.192) 172.409,142.265 ccw(c172.409,143.339) v1@173.168,142.58
NetU8_6: U8.6 U8.22 U11.1 | length 56.4
  Top Layer w0.381: U8.6@219.456,112.966 cw(c219.456,111.587) 220.432,112.562 cw(c221.407,113.538) U8.6@220.028,113.538 ; U8.6@219.456,113.538 220.732,112.262 220.732,105.321 223.774,102.279 U11.1@223.774,83.82 ; U11.1@223.378,84.216 ccw(c222.423,85.171) 223.774,85.171 ccw(c225.125,85.171) U11.1@224.17,84.216
  Bottom Layer w0.381: U8.6@219.456,112.966 cw(c219.456,111.587) 220.432,112.562 cw(c221.407,113.538) U8.6@220.028,113.538 ; U8.6@219.456,113.538 220.483,112.511 233.183,112.511 U8.22@234.696,110.998 ; U8.22@234.124,110.998 ccw(c232.745,110.998) 233.72,111.974 ccw(c234.696,112.949) U8.22@234.696,111.569
NetU8_9: U8.9 U11.4 | length 35.6
  Top Layer w0.381: U8.9@219.456,105.918 219.456,105.131 220.345,104.623 222.504,102.464 222.504,80.645 223.139,80.01 224.409,80.01 225.044,79.375 225.044,77.47 U11.4@223.774,76.2 ; U11.4@223.774,76.759 ccw(c223.774,78.11) 224.729,77.155 ccw(c225.684,76.2) U11.4@224.333,76.2
NetU12_2: U12.2 U13.1 | length 76.8
  Top Layer w0.381: U12.2@161.656,124.318 cw(c160.701,123.363) 162.052,123.363 cw(c163.403,123.363) U12.2@162.448,124.318 ; U12.2@162.052,124.714 162.052,119.708 165.049,116.711 165.049,103.276 167.183,101.143 v1(167.183,76.327) ; v1@166.868,76.641 ccw(c166.11,77.4) 167.183,77.4 ccw(c168.256,77.4) v1@167.497,76.641
  Bottom Layer w0.381: U13.1@149.098,77.47 154.102,77.47 155.359,76.213 167.069,76.213 v1(167.183,76.327) ; U13.1@149.494,77.074 cw(c150.449,76.119) 150.449,77.47 cw(c150.449,78.821) U13.1@149.494,77.866 ; 165.834,76.213 ccw(c165.834,77.676) v1@166.868,76.641 ; 166.386,76.213 cw(c166.386,75.53) v1@166.868,76.013
NetU12_6: U12.6 U16.6 | length 23.9
  Top Layer w0.381: v1(170.358,137.084) 170.942,136.5 170.942,129.21 172.212,127.94 U12.6@172.212,124.714 ; U12.6@171.816,125.11 ccw(c170.861,126.065) 172.212,126.065 ccw(c173.563,126.065) U12.6@172.608,125.11
  Bottom Layer w0.381: U16.6@165.862,137.986 169.456,137.986 v1(170.358,137.084) ; U16.6@166.258,137.59 cw(c167.213,136.635) 167.213,137.986 cw(c167.213,139.336) U16.6@166.258,138.381 ; v1@169.913,137.084 ccw(c168.84,137.084) 169.599,137.843 ccw(c170.358,138.601) v1@170.358,137.528
NetU12_8: U12.8 U16.8 | length 45.4
  Top Layer w0.381: U16.8@162.763,151.575 cw(c161.412,151.575) 162.367,150.619 cw(c163.322,149.664) U16.8@163.322,151.015 ; U16.8@163.322,151.575 162.065,150.317 160.007,150.317 159.512,150.812 159.512,152.502 161.29,154.28 169.621,154.28 174.752,149.149 U12.8@174.752,132.334 ; U12.8@174.356,132.73 ccw(c173.401,133.685) 174.752,133.685 ccw(c176.103,133.685) U12.8@175.148,132.73
NetU12_10: U12.10 U16.9 | length 33.2
  Top Layer w0.381: U16.9@160.782,151.575 162.039,152.832 167.97,152.832 168.935,151.867 168.935,136.399 169.672,135.662 U12.10@169.672,132.334 ; U16.9@160.782,152.134 ccw(c160.782,153.485) 161.737,152.53 ccw(c162.692,151.575) U16.9@161.341,151.575 ; U12.10@169.276,132.73 ccw(c168.321,133.685) 169.672,133.685 ccw(c171.023,133.685) U12.10@170.068,132.73
NetU12_12: U12.12 U16.12 | length 32.4
  Top Layer w0.381: U16.12@153.162,151.016 cw(c153.162,149.667) 154.116,150.621 cw(c155.07,151.575) U16.12@153.721,151.575 ; U16.12@153.162,151.575 154.407,150.33 154.407,135.407 156.21,133.604 163.322,133.604 U12.12@164.592,132.334 ; U12.12@164.033,132.334 ccw(c162.682,132.334) 163.637,133.289 ccw(c164.592,134.244) U12.12@164.592,132.893
NetU14_1: U14.1 U18.6 | length 10.5
  Bottom Layer w0.381: U18.6@206.375,150.952 cw(c206.375,149.601) 207.33,150.556 cw(c208.285,151.511) U18.6@206.934,151.511 ; U18.6@206.375,151.511 207.772,150.114 U14.1@212.09,150.114 ; U14.1@211.694,149.718 ccw(c210.739,148.763) 210.739,150.114 ccw(c210.739,151.465) U14.1@211.694,150.51
NetU14_2: U14.2 U18.4 | length 19
  Top Layer w0.381: U18.4@203.439,136.667 ccw(c202.484,137.622) 203.835,137.622 ccw(c205.186,137.622) U18.4@204.231,136.667 ; U18.4@203.835,136.271 203.835,139.319 U14.2@212.09,147.574 ; U14.2@211.531,147.574 cw(c210.18,147.574) 211.135,146.619 cw(c212.09,145.664) U14.2@212.09,147.015
NetU14_3: U14.3 U18.2 | length 44.3
  Top Layer w0.381: U18.2@198.196,136.271 ccw(c196.845,136.271) 197.8,137.226 ccw(c198.755,138.181) U18.2@198.755,136.83 ; U18.2@198.755,136.271 197.485,137.541 197.485,152.146 198.12,152.781 212.09,152.781 213.36,151.511 213.36,146.304 U14.3@212.09,145.034 ; U14.3@212.09,145.593 ccw(c212.09,146.944) 213.045,145.989 ccw(c214,145.034) U14.3@212.649,145.034
NetU14_4: U14.4 U18.1 | length 52.2
  Top Layer w0.381: U18.1@195.819,136.667 ccw(c194.864,137.622) 196.215,137.622 ccw(c197.566,137.622) U18.1@196.611,136.667 ; U18.1@196.215,136.271 196.215,148.463 194.945,149.733 194.945,152.908 195.58,153.543 213.36,153.543 214.046,152.857 214.046,144.45 U14.4@212.09,142.494 ; U14.4@212.09,143.053 ccw(c212.09,144.404) 213.045,143.449 ccw(c214,142.494) U14.4@212.649,142.494
NetU14_5: U14.5 U18.9 | length 80.4
  Bottom Layer w0.381: U18.9@198.755,151.511 200.686,153.442 234.949,153.442 238.531,149.86 238.531,144.704 237.49,143.662 234.798,143.662 232.156,146.304 222.25,146.304 221.488,145.542 221.488,144.729 220.523,143.764 218.457,143.764 216.992,142.299 215.375,142.299 213.03,139.954 U14.5@212.09,139.954 ; U18.9@198.755,152.07 ccw(c198.755,153.421) 199.71,152.466 ccw(c200.665,151.511) U18.9@199.314,151.511
NetU14_6: U14.6 U18.10 | length 55.9
  Top Layer w0.381: U14.6@212.09,137.414 214.859,137.414 216.154,138.709 220.599,138.709 220.955,139.065 220.955,140.653 220.409,141.199 219.075,141.199 217.119,143.155 v1(217.119,150.749) ; U14.6@212.486,137.018 cw(c213.441,136.063) 213.441,137.414 cw(c213.441,138.765) U14.6@212.486,137.81 ; v1@216.805,150.435 cw(c216.046,149.676) 217.119,149.676 cw(c218.192,149.676) v1@217.434,150.435
  Bottom Layer w0.381: U18.10@196.121,150.96 cw(c196.014,150.335) 196.648,150.335 ; U18.10@196.185,151.335 cw(c196.091,150.786) 196.648,150.786 ; U18.10@196.215,151.511 196.648,151.078 196.648,150.417 197.485,149.58 203.809,149.58 205.13,150.901 205.13,152.4 205.486,152.756 215.112,152.756 v1(217.119,150.749) ; v1@216.675,150.749 ccw(c215.602,150.749) 216.36,151.508 ccw(c217.119,152.267) v1@217.119,151.194
NetU14_7: U14.7 U18.5 | length 10.5
  Bottom Layer w0.381: U18.5@206.375,135.712 cw(c206.375,134.361) 207.33,135.316 cw(c208.285,136.271) U18.5@206.934,136.271 ; U18.5@206.375,136.271 207.772,134.874 U14.7@212.09,134.874 ; U14.7@211.694,134.478 ccw(c210.739,133.523) 210.739,134.874 ccw(c210.739,136.225) U14.7@211.694,135.27
NetU14_9: U14.9 U15.14 | length 23.6
  Top Layer w0.381: U14.9@219.71,132.334 221.032,132.334 ; U14.9@220.112,131.944 cw(c221.032,131.052) 221.032,132.334 ; U14.9@220.112,132.724 ccw(c221.032,133.616) 221.032,132.334 ; U15.14@230.327,145.034 cw(c228.976,145.034) 229.931,144.079 cw(c230.886,143.124) U15.14@230.886,144.475 ; U15.14@230.886,145.034 229.616,143.764 229.616,138.684 224.536,133.604 222.302,133.604 221.032,132.334
NetU14_15: U14.15 U18.7 | length 51.2
  Bottom Layer w0.381: U18.7@203.276,151.511 cw(c201.925,151.511) 202.88,150.556 cw(c203.835,149.601) U18.7@203.835,150.952 ; U18.7@203.835,151.511 202.59,150.266 198.12,150.266 197.485,150.901 197.485,152.222 196.85,152.857 192.354,152.857 191.897,152.4 191.897,148.692 194.285,146.304 217.779,146.304 218.61,147.135 ; 219.029,147.135 ccw(c219.029,147.64) U14.15@219.532,147.591 ; U14.15@219.153,147.628 cw(c218.61,147.681) 218.61,147.135 ; U14.15@219.71,147.574 219.271,147.135 218.61,147.135
NetU15_1: U15.1 U17.6 | length 35.4
  Bottom Layer w0.381: U17.6@193.167,150.952 cw(c193.167,149.601) 194.122,150.556 cw(c195.077,151.511) U17.6@193.726,151.511 ; U17.6@193.167,151.511 195.834,148.844 221.335,148.844 222.166,149.675 ; U15.1@222.585,149.675 ccw(c222.585,150.18) U15.1@223.088,150.131 ; U15.1@222.709,150.168 cw(c222.166,150.221) 222.166,149.675 ; U15.1@223.266,150.114 222.827,149.675 222.166,149.675
NetU15_2: U15.2 U17.4 | length 59.7
  Top Layer w0.381: U17.4@190.627,136.271 191.897,137.541 191.897,152.4 193.827,154.33 221.336,154.33 224.536,151.13 224.536,148.844 U15.2@223.266,147.574 ; U17.4@190.627,136.83 ccw(c190.627,138.181) 191.582,137.226 ccw(c192.537,136.271) U17.4@191.186,136.271 ; U15.2@223.266,148.133 ccw(c223.266,149.484) 224.221,148.529 ccw(c225.176,147.574) U15.2@223.825,147.574
NetU15_3: U15.3 U17.2 | length 70.3
  Top Layer w0.381: U17.2@185.547,136.271 186.817,137.541 186.817,153.67 188.163,155.016 222.402,155.016 225.222,152.197 225.222,146.99 U15.3@223.266,145.034 ; U17.2@185.547,136.83 ccw(c185.547,138.181) 186.502,137.226 ccw(c187.457,136.271) U17.2@186.106,136.271 ; U15.3@223.266,145.593 ccw(c223.266,146.944) 224.221,145.989 ccw(c225.176,145.034) U15.3@223.825,145.034
NetU15_4: U15.4 U17.1 | length 47.6
  Bottom Layer w0.381: U17.1@183.007,136.271 186.667,139.931 209.623,139.931 210.845,138.709 213.335,138.709 215.851,141.224 220.853,141.224 222.123,142.494 ; U17.1@183.007,136.83 ccw(c183.007,138.181) 183.962,137.226 ccw(c184.917,136.271) U17.1@183.566,136.271 ; U15.4@222.824,142.151 ccw(c222.123,141.606) 222.123,142.494 ; U15.4@222.824,142.837 cw(c222.123,143.382) 222.123,142.494 ; U15.4@223.266,142.494 222.123,142.494
NetU15_5: U15.5 U17.9 | length 80.8
  Top Layer w0.381: v1@209.982,142.075 cw(c209.982,141.002) 210.741,141.761 cw(c211.499,142.519) v1@210.426,142.519 ; v1(209.982,142.519) 211.253,141.249 213.67,141.249 215.544,143.123 215.544,151.257 216.687,152.4 219.583,152.4 221.488,150.495 221.488,144.526 222.25,143.764 224.155,143.764 224.536,143.383 224.536,141.224 U15.5@223.266,139.954 ; U15.5@223.266,140.513 ccw(c223.266,141.864) 224.221,140.909 ccw(c225.176,139.954) U15.5@223.825,139.954
  Bottom Layer w0.381: U17.9@185.151,151.115 cw(c184.196,150.16) 185.547,150.16 cw(c186.898,150.16) U17.9@185.943,151.115 ; U17.9@185.547,151.511 185.547,146.139 183.871,144.463 183.871,143.205 185.014,142.062 209.525,142.062 v1(209.982,142.519) ; 207.805,142.062 ccw(c207.805,144.696) v1@209.667,142.834 ; 208.725,142.062 ccw(c208.725,143.776) v1@209.937,142.564
NetU15_6: U15.6 U17.10 | length 87.5
  Top Layer w0.381: U15.6@223.266,137.414 228.727,142.875 228.727,144.78 230.251,146.304 232.131,146.304 234.239,148.412 234.239,150.667 v1(238.354,154.781) ; U15.6@223.266,137.973 ccw(c223.266,139.324) 224.221,138.369 ccw(c225.176,137.414) U15.6@223.825,137.414 ; v1@237.909,154.781 cw(c236.836,154.781) 237.595,154.023 cw(c238.354,153.264) v1@238.354,154.337
  Bottom Layer w0.381: U17.10@183.007,151.511 183.007,152.426 185.419,154.838 238.297,154.838 v1(238.354,154.781) ; 237.143,154.838 cw(c237.143,153.571) v1@238.039,154.467 ; 237.418,154.838 ccw(c237.418,155.717) v1@238.039,155.096
NetU15_7: U15.7 U17.5 | length 36
  Bottom Layer w0.381: U17.5@193.167,135.712 cw(c193.167,134.361) 194.122,135.316 cw(c195.077,136.271) U17.5@193.726,136.271 ; U17.5@193.167,136.271 195.834,133.604 221.996,133.604 U15.7@223.266,134.874 ; U15.7@222.707,134.874 cw(c221.356,134.874) 222.311,133.919 cw(c223.266,132.964) U15.7@223.266,134.315
NetU15_15: U15.15 U17.7 | length 54.6
  Bottom Layer w0.381: U17.7@190.231,151.115 cw(c189.276,150.16) 190.627,150.16 cw(c191.978,150.16) U17.7@191.023,151.115 ; U17.7@190.627,151.511 190.627,145.415 191.592,144.45 210.744,144.45 211.43,143.764 213.843,143.764 215.697,145.618 218.465,145.618 219.151,146.304 221.209,146.304 222.021,147.116 222.021,148.297 222.567,148.844 229.616,148.844 U15.15@230.886,147.574 ; U15.15@230.327,147.574 ccw(c228.976,147.574) 229.931,148.529 ccw(c230.886,149.484) U15.15@230.886,148.133
P0.0: J5.7 J6.7 Pu2.2 RPZ1.2 U1.39 U2.2 U4.11 U5.4 U7.34 U8.17 | length 315.8
  Top Layer w0.381: J6.7@99.68,25.796 ccw(c98.725,26.751) 100.076,26.751 ccw(c101.427,26.751) J6.7@100.472,25.796 ; J5.7@99.68,31.1 cw(c98.725,30.145) 100.076,30.145 cw(c101.427,30.145) J5.7@100.472,31.1 ; J5.7@99.68,31.892 ccw(c97.131,34.441) 100.736,34.441 ; J5.7@99.95,31.622 ccw(c98.051,33.521) 100.736,33.521 ; J6.7@100.076,25.4 J5.7@100.076,31.496 100.736,32.156 v1(100.736,46.482) ; J5.7@100.219,31.353 ccw(c98.971,32.601) 100.736,32.601 ; v1@100.422,46.168 cw(c99.663,45.409) 100.736,45.409 cw(c101.81,45.409) v1@101.051,46.168 ; U7.34@127,53.594 128.397,53.594 130.708,55.905 v1(130.708,70.561) ; U7.34@127.404,53.19 cw(c128.38,52.214) 128.38,53.594 cw(c128.38,54.974) U7.34@127.404,53.998 ; v1@130.394,70.247 cw(c129.635,69.488) 130.708,69.488 cw(c131.782,69.488) v1@131.023,70.247 ; v1@151.908,78.927 ccw(c151.149,79.686) 152.222,79.686 ccw(c153.295,79.686) v1@152.537,78.927 ; v1@151.908,80.712 cw(c151.149,79.953) 152.222,79.953 cw(c153.295,79.953) v1@152.537,80.712 ; v1(152.222,78.613) v1(152.222,81.026) ; v1@192.7,114.14 cw(c191.941,113.381) 193.015,113.381 cw(c194.088,113.381) v1@193.329,114.14 ; v1(193.015,114.454) 193.015,111.277 193.878,110.414 193.878,97.655 195.825,95.709 197.131,95.709 v1(198.399,97.015) 201.422,97.015 201.917,96.52 201.917,87.516 U2.2@200,85.598 197.358,82.956 197.358,81.534 RPZ1.2@196.088,80.264 ; RPZ1.2@196.088,80.835 ccw(c196.088,82.215) 197.064,81.24 ccw(c198.039,80.264) RPZ1.2@196.659,80.264 ; v1@197.955,97.009 cw(c196.882,96.993) 197.652,96.245 cw(c198.422,95.498) v1@198.406,96.571 ; v1@198.714,96.701 cw(c199.473,95.942) 199.473,97.015 cw(c199.473,98.088) v1@198.714,97.33 ; U2.2@199.428,85.598 cw(c198.048,85.598) 199.024,84.622 cw(c200,83.647) U2.2@200,85.026 ; U2.2@200,86.169 ccw(c200,87.549) 200.975,86.574 ccw(c201.951,85.598) U2.2@200.571,85.598 ; v1@228.651,101.663 cw(c228.651,100.59) 229.41,101.349 cw(c230.168,102.108) v1@229.095,102.108 ; v1(228.651,102.108) v1(231.191,99.568) ; v1@230.746,99.568 ccw(c229.673,99.568) 230.432,100.327 ccw(c231.191,101.086) v1@231.191,100.013
  Bottom Layer w0.381: v1(100.736,46.482) 112.42,58.166 124.886,58.166 125.426,57.626 125.426,55.168 U7.34@127,53.594 ; v1@100.736,46.926 ccw(c100.736,48) 101.495,47.241 ccw(c102.254,46.482) v1@101.181,46.482 ; U7.34@126.428,53.594 ccw(c125.049,53.594) 126.024,54.57 ccw(c127,55.545) U7.34@127,54.165 ; v1(130.708,70.561) 140.411,80.264 143.408,80.264 144.17,81.026 v1(152.222,81.026) ; v1@130.708,71.006 ccw(c130.708,72.079) 131.467,71.32 ccw(c132.226,70.561) v1@131.153,70.561 ; v1@151.908,80.712 ccw(c151.149,79.953) 151.149,81.026 ccw(c151.149,82.099) v1@151.908,81.34 ; v1(152.222,78.613) 152.349,78.74 176.911,78.74 U1.39@178.181,80.01 179.197,78.994 187.706,78.994 Pu2.2@188.976,80.264 189.087,80.153 194.439,80.153 194.55,80.264 RPZ1.2@196.088,80.264 ; v1@152.537,78.299 cw(c153.602,77.233) 153.602,78.74 ; v1@152.537,78.927 ccw(c152.989,79.38) 152.989,78.74 ; U1.39@177.609,80.01 cw(c176.23,80.01) 177.205,79.034 cw(c178.181,78.059) U1.39@178.181,79.438 ; U5.4@181.376,114.454 v1(193.015,114.454) ; U5.4@181.772,114.058 cw(c182.727,113.103) 182.727,114.454 cw(c182.727,115.805) U5.4@181.772,114.85 ; Pu2.2@188.417,80.264 cw(c187.066,80.264) 188.021,79.309 cw(c188.976,78.354) Pu2.2@188.976,79.705 ; Pu2.2@189.372,79.868 cw(c190.06,79.18) 190.06,80.153 ; Pu2.2@189.372,80.66 ccw(c190.594,81.882) 190.594,80.153 ; v1@192.7,114.14 ccw(c191.941,113.381) 191.941,114.454 ccw(c191.941,115.527) v1@192.7,114.768 ; RPZ1.2@195.684,79.86 ccw(c194.708,78.884) 194.708,80.264 ccw(c194.708,81.644) RPZ1.2@195.684,80.668 ; v1@198.085,97.33 ccw(c197.326,98.088) 198.399,98.088 ccw(c199.473,98.088) v1@198.714,97.33 ; v1(198.399,97.015) 198.399,98.577 U4.11@200.66,100.838 201.93,99.568 216.992,99.568 217.754,100.33 217.754,101.422 218.44,102.108 v1(228.651,102.108) ; U4.11@200.088,100.838 cw(c198.709,100.838) 199.684,99.862 cw(c200.66,98.887) 200.66,100.266 cw(c200.66,98.887) 201.636,99.862 cw(c202.611,100.838) U4.11@201.231,100.838 ; v1@228.336,101.794 ccw(c227.578,101.035) 227.578,102.108 ccw(c227.578,103.181) v1@228.336,102.422 ; v1@231.191,99.123 cw(c231.191,98.05) 231.95,98.809 cw(c232.708,99.568) v1@231.635,99.568 ; v1(231.191,99.568) 232.461,98.298 U8.17@234.696,98.298 ; U8.17@234.292,97.894 ccw(c233.316,96.918) 233.316,98.298 ccw(c233.316,99.678) U8.17@234.292,98.702
P0.1: J5.8 J6.8 Pu2.3 RPZ1.3 U1.38 U2.3 U4.12 U5.5 U7.33 U8.14 | length 333.9
  Top Layer w0.381: J6.8@102.22,25.796 ccw(c101.265,26.751) 102.616,26.751 ccw(c103.967,26.751) J6.8@103.012,25.796 ; J5.8@102.22,31.1 cw(c101.265,30.145) 102.616,30.145 cw(c103.967,30.145) J5.8@103.012,31.1 ; J6.8@102.616,25.4 J5.8@102.616,31.496 ; 120.675,36.32 ccw(c122.045,36.32) v1@121.076,35.351 ; 120.675,37.239 ccw(c122.964,37.239) v1@121.345,35.62 ; v1(121.031,35.306) 120.675,35.662 120.675,46.659 119.989,47.345 119.989,51.739 121.336,53.086 123.368,53.086 124.892,54.61 125.298,56.134 U7.33@127,56.134 ; U7.33@126.596,55.73 ccw(c125.62,54.754) 125.62,56.134 ccw(c125.62,57.514) U7.33@126.596,56.538 ; v1@182.159,75.886 cw(c181.4,75.127) 182.474,75.127 cw(c183.547,75.127) v1@182.788,75.886 ; v1(182.474,76.2) 182.474,61.392 185.191,58.674 187.325,58.674 ; v1(182.931,33.325) 185.42,35.814 190.221,35.814 192.405,37.998 192.405,40.957 190.221,43.141 190.221,50.698 189.865,51.054 188.087,51.054 187.706,51.435 187.706,58.293 187.325,58.674 ; v1@182.931,33.769 ccw(c182.931,34.842) 183.69,34.084 ccw(c184.448,33.325) v1@183.375,33.325 ; Pu2.3@188.417,77.724 cw(c187.066,77.724) 188.021,76.769 cw(c188.976,75.814) Pu2.3@188.976,77.165 ; Pu2.3@188.976,77.724 187.706,76.454 187.706,59.055 187.325,58.674 ; v1@194.564,111.64 cw(c193.805,110.881) 194.878,110.881 cw(c195.951,110.881) v1@195.192,111.64 ; v1(194.878,111.954) 194.878,98.901 195.58,98.199 199.565,98.199 200.063,97.701 U4.12@200.66,98.298 201.257,97.701 201.93,97.701 ; RPZ1.3@196.088,77.724 198.044,79.68 198.044,81.102 202.603,85.661 202.603,97.028 201.93,97.701 ; U2.3@199.428,83.058 cw(c198.048,83.058) 199.024,82.082 cw(c200,81.107) U2.3@200,82.486 ; U2.3@200,83.629 ccw(c200,85.009) 200.975,84.034 ccw(c201.951,83.058) U2.3@200.571,83.058 ; U4.12@200.85,98.314 ccw(c201.516,98.369) 201.516,97.701 ; U4.12@201.23,98.346 ccw(c201.93,98.404) 201.93,97.701 ; 202.603,92.529 cw(c205.194,92.529) v1@203.362,94.361 ; 202.603,93.449 cw(c204.274,93.449) v1@203.093,94.631 ; v1@202.603,94.231 v1(203.048,94.676) ; 202.603,95.902 ccw(c204.274,95.902) v1@203.093,94.72 ; 202.603,96.822 ccw(c205.194,96.822) v1@203.362,94.99
  Bottom Layer w0.381: J5.8@102.616,31.496 106.566,35.446 138.125,35.446 140.957,32.614 156.667,32.614 159.614,35.56 180.696,35.56 v1(182.931,33.325) ; J5.8@102.616,32.055 ccw(c102.616,33.406) 103.571,32.451 ccw(c104.526,31.496) J5.8@103.175,31.496 ; 119.621,35.446 cw(c119.621,33.896) v1@120.717,34.992 ; 120.295,35.446 ccw(c120.295,36.042) v1@120.717,35.62 ; v1@120.891,35.446 v1(121.031,35.306) ; v1@121.345,34.992 cw(c122.441,33.896) 122.441,35.446 ; v1@121.345,35.62 ccw(c121.767,36.042) 121.767,35.446 ; U1.38@178.181,77.47 181.204,77.47 v1(182.474,76.2) ; U1.38@178.585,77.066 cw(c179.561,76.09) 179.561,77.47 cw(c179.561,78.85) U1.38@178.585,77.874 ; U5.5@181.376,111.954 v1(194.878,111.954) ; U5.5@181.772,111.558 cw(c182.727,110.603) 182.727,111.954 cw(c182.727,113.305) U5.5@181.772,112.35 ; v1@182.029,76.2 ccw(c180.956,76.2) 181.715,76.959 ccw(c182.474,77.718) v1@182.474,76.644 ; v1@182.486,33.325 ccw(c181.413,33.325) 182.172,34.084 ccw(c182.931,34.842) v1@182.931,33.769 ; Pu2.3@188.976,77.724 RPZ1.3@196.088,77.724 ; Pu2.3@189.372,77.328 cw(c190.327,76.373) 190.327,77.724 cw(c190.327,79.075) Pu2.3@189.372,78.12 ; v1@194.564,111.64 ccw(c193.805,110.881) 193.805,111.954 ccw(c193.805,113.027) v1@194.564,112.268 ; RPZ1.3@195.684,77.32 ccw(c194.708,76.344) 194.708,77.724 ccw(c194.708,79.104) RPZ1.3@195.684,78.128 ; v1@203.048,94.231 cw(c203.048,93.158) 203.806,93.917 cw(c204.565,94.676) v1@203.492,94.676 ; v1(203.048,94.676) 204.086,93.637 213.804,93.637 214.643,94.475 216.548,94.475 217.805,93.218 U8.14@219.456,93.218 ; U8.14@219.052,92.814 ccw(c218.076,91.838) 218.076,93.218 ccw(c218.076,94.598) U8.14@219.052,93.622